# Altium PCB Breakout pcb.PcbDoc
Units mil, origin at the board's own origin, x right, y up, seen from the top; angles counter-clockwise.
Board outline 3280 x 1940 mil, 2 copper layers (Top Layer 1, Bottom Layer 1); 2 components, 34 nets, 72 pads, 30 vias.
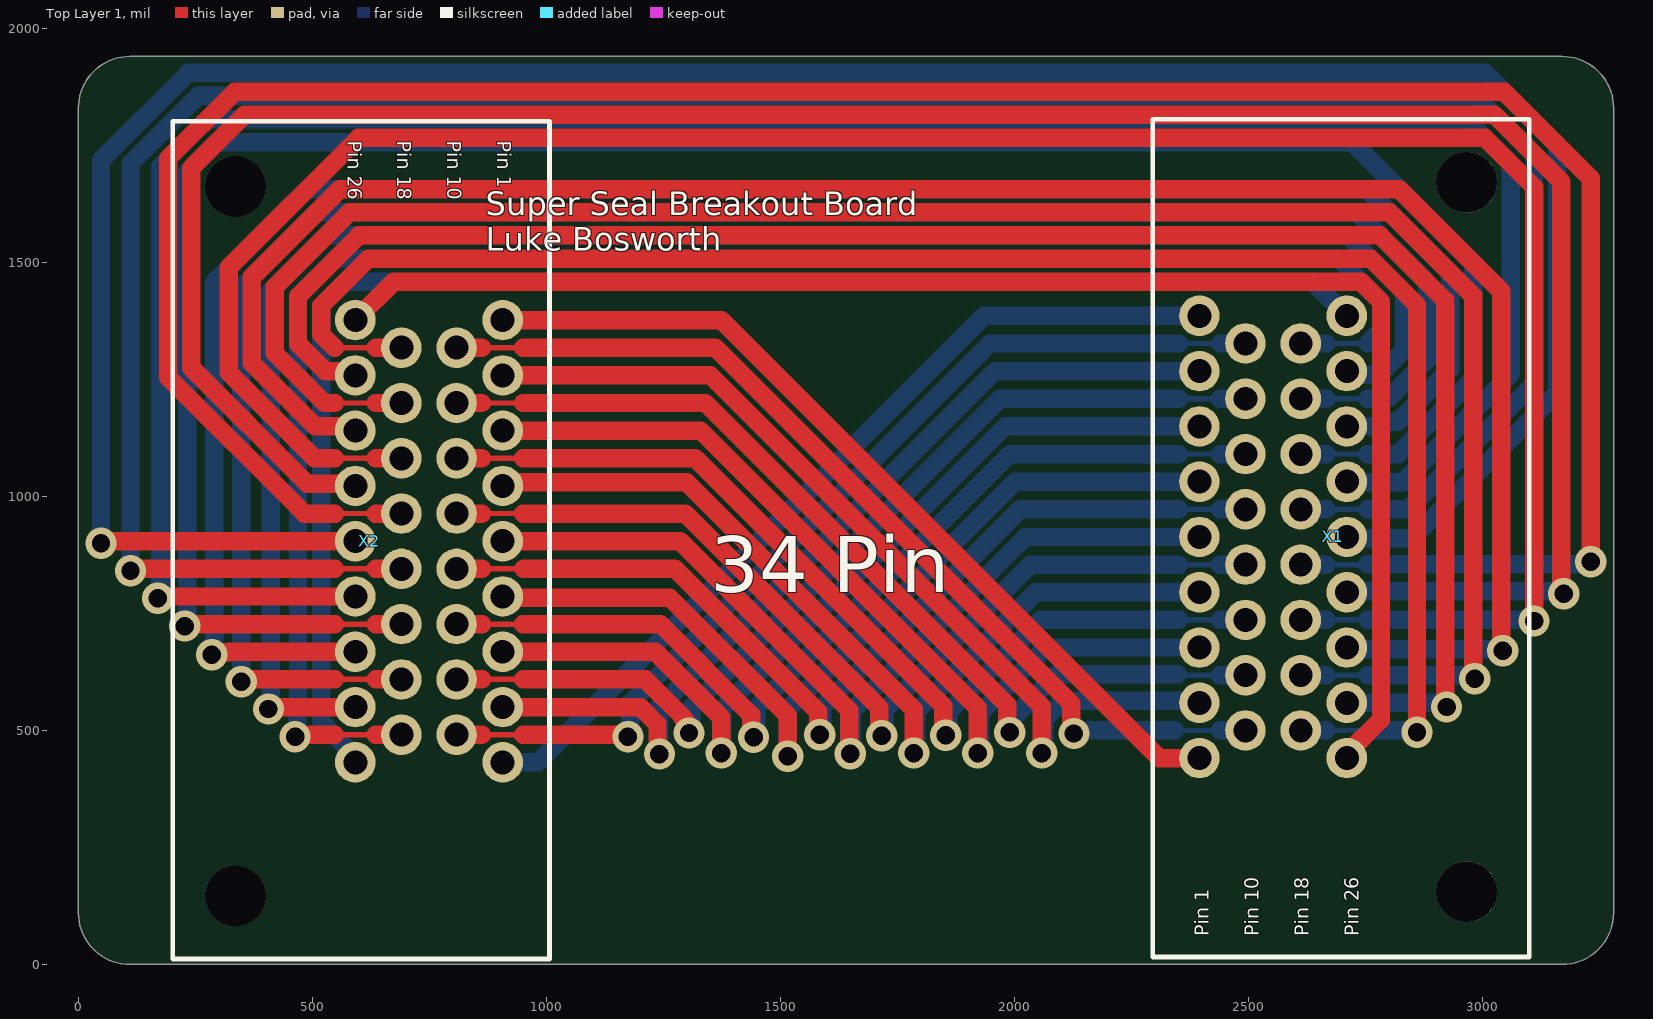
[diagram p0: Top Layer 1 view]
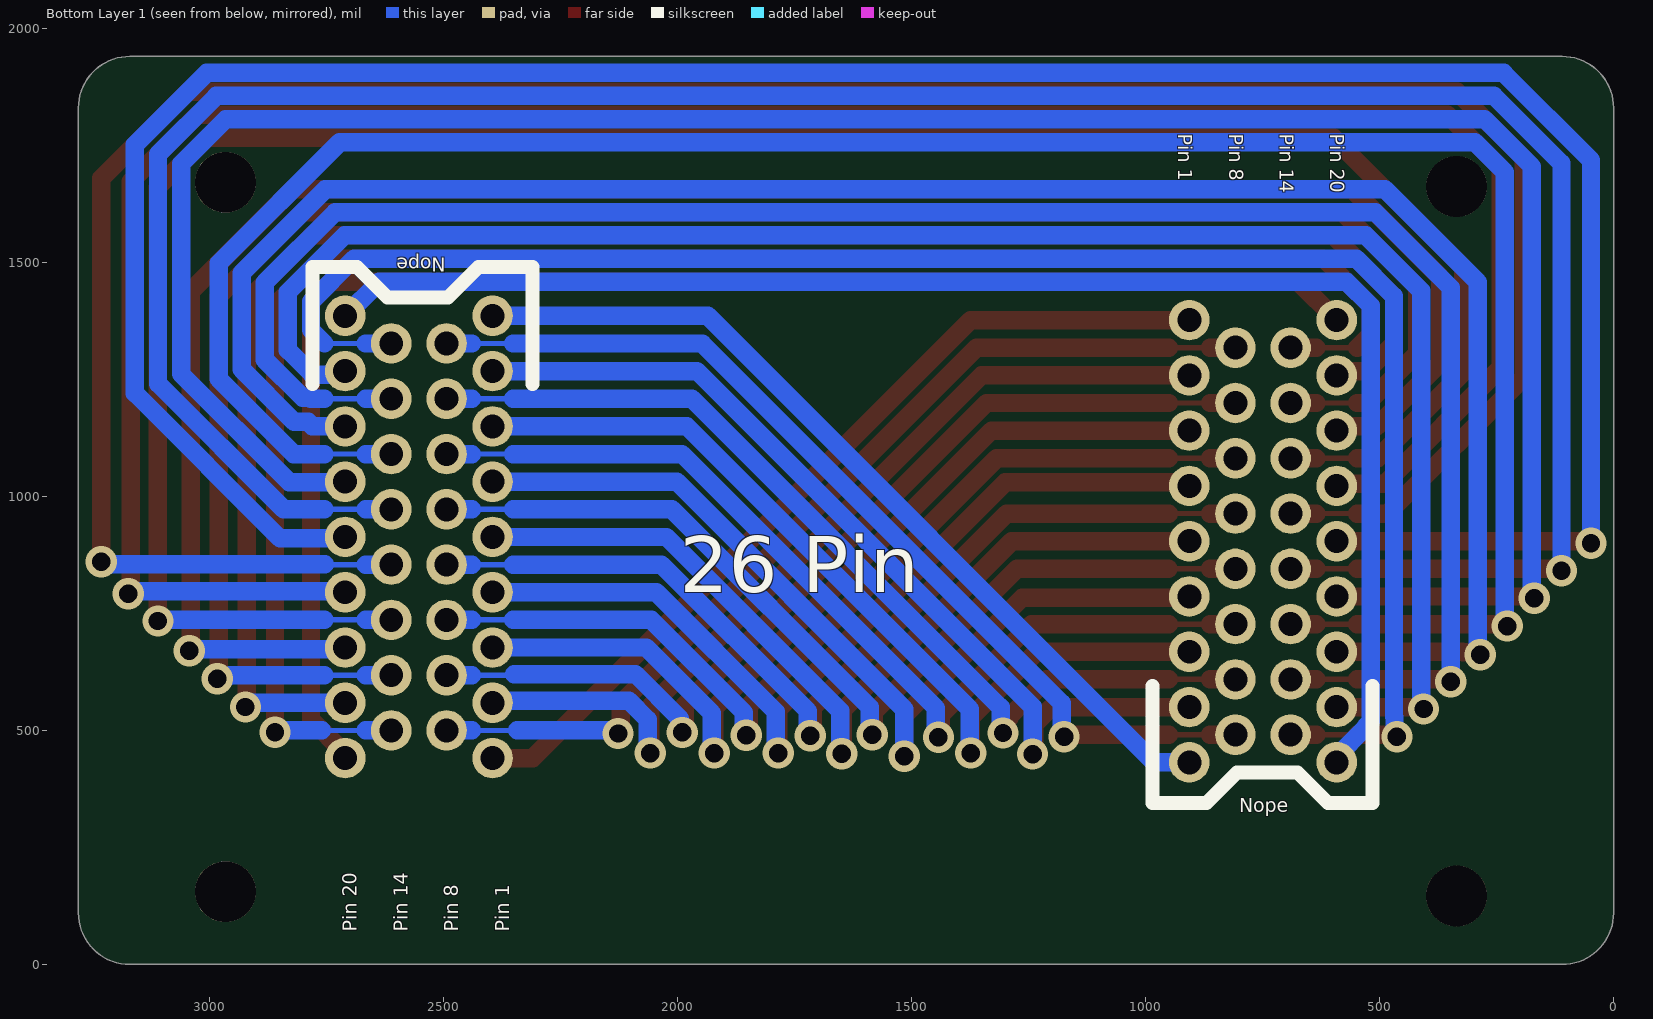
[diagram p1: Bottom Layer 1 view, seen from below]

## Layer stack, top to bottom
Top Solder: solder mask 0.4, Solder Resist, Dk 3.5
Top Layer 1: signal copper 1.378
Dielectric 1: dielectric 12.6, FR-4, Dk 4.8
Bottom Layer 1: signal copper 1.378
Bottom Solder: solder mask 0.4, Solder Resist, Dk 3.5

## Board outline
110.78,0.78 3170.78,0.78 ccw(c3170.78,110.78) 3280.78,110.78 3280.78,1830.78 ccw(c3170.78,1830.78) 3170.78,1940.78 110.78,1940.78 ccw(c110.78,1830.78) 0.78,1830.78 0.78,110.78 ccw(c110.78,110.78)

## Design rules (kind name [scope] priority, off if disabled: settings)
BoardOutlineClearance [All] p1: gap=7.87 ignorepadtopadclearanceinfootprint=FALSE except(15.75: Arc-SplitBarrior Arc-SplitContinuation Track-SplitBarrior Track-SplitContinuation SMDPad-SplitBarrior SMDPad-SplitContinuation THPad-SplitBarrior THPad-SplitContinuation Via-SplitBarrior Via-SplitContinuation Fill-SplitBarrior Fill-SplitContinuation Poly-SplitBarrior Poly-SplitContinuation Region-SplitBarrior Region-SplitContinuation Text-SplitBarrior Text-SplitContinuation)
Clearance "Clearance Bottom Layer" [OnLayer('Bottom Layer')] p1: gap=8 ignorepadtopadclearanceinfootprint=TRUE except(10: Arc-Text Track-Text SMDPad-Text THPad-Text Via-Text Fill-Text Poly-Text Region-Text Text-Text)
Clearance "Clearance Top Layer" [OnLayer('Top Layer')] p2: gap=8 ignorepadtopadclearanceinfootprint=TRUE except(10: Arc-Text Track-Text SMDPad-Text THPad-Text Via-Text Fill-Text Poly-Text Region-Text Text-Text)
Clearance [All] p3: gap=7.87 ignorepadtopadclearanceinfootprint=FALSE except(3.5: Arc-Arc Arc-Track Arc-SMDPad Track-Track Track-SMDPad SMDPad-SMDPad; 5: Arc-Via Track-Via SMDPad-Via THPad-Via Via-Via; 10: Arc-Text Track-Text SMDPad-Text THPad-Text Via-Text Fill-Text Poly-Text Region-Text Text-Text)
HoleSize [All] p1: absolutevalues=TRUE maxlimit=248.03 minlimit=7.87 maxpercent=80.000 minpercent=20.000
MinimumAnnularRing [All] p1: minimumring=3
MinimumSolderMaskSliver [All] p1: minsoldermaskwidth=3.94
PolygonConnect PolygonConnect_1 [All] p1: thpad.connectstyle=Relief thpad.reliefconductorwidth=20 thpad.reliefentries=4 thpad.polygonreliefangle="90 Angle" thpad.airgapwidth=10 smdpad.connectstyle=Relief smdpad.reliefconductorwidth=20 smdpad.reliefentries=4 smdpad.polygonreliefangle="90 Angle" smdpad.airgapwidth=10 via.connectstyle=Direct via.reliefconductorwidth=20 via.reliefentries=4 via.polygonreliefangle="90 Angle" via.airgapwidth=10
RoutingCorners [All] p1: cornerstyle=Round minsetback=100 maxsetback=100
RoutingVias [All] p1: holewidth=19.68 width=39.37 viastyle="Through Hole" minholewidth=7.87 minwidth=17.72 maxholewidth=39.37 maxwidth=78.74
SilkToSilkClearance [All] p1: silktosilkclearance=3.94
SilkToSolderMaskClearance [IsPad] p1: minsilkscreentomaskgap=3.94 clearancetoexposedcopper=TRUE
SolderMaskExpansion [All] p1: expansion=4 istentingtop=FALSE
Width [All] p1: maxlimit=100 minlimit=3.5 preferedwidth=15
25 further rules are at their usual default settings.

## Components (designator, comment, footprint, x,y, rotation, side; value= is the part's Value field where it differs from the comment)
X1 "6437288-1" 6437288-1 2395.82,441.59 r90 top
X2 "6437288-1" 6437288-1 907.32,1377.42 r270 top

## Footprints (in the part's own frame and the unit in brackets; to place one, negate y for a bottom-side part, rotate by r counter-clockwise, add the part's x,y. Pads: shape width x height; smd on the part's side, far side on the other; paste and mask are expansions set on the pad)
6437288-1 [mm]
  round 2.2 hole 1.3: A1(0,0) A2(3,0) A3(6,0) A4(9,0) A5(12,0) A6(15,0) A7(18,0) A8(21,0) A9(24,0) A10(1.5,-2.5) A11(4.5,-2.5) A12(7.5,-2.5) A13(10.5,-2.5) A14(13.5,-2.5) A15(16.5,-2.5) A16(19.5,-2.5) A17(22.5,-2.5) A18(1.5,-5.5) A19(4.5,-5.5) A20(7.5,-5.5) A21(10.5,-5.5) A22(13.5,-5.5) A23(16.5,-5.5) A24(19.5,-5.5) A25(22.5,-5.5) A26(0,-8) A27(3,-8) A28(6,-8) A29(9,-8) A30(12,-8) A31(15,-8) A32(18,-8) A33(21,-8) A34(24,-8)
  round 3.3 hole 3.3 unplated: MH(-7.25,-14.5) MH(31.25,-14.5)
  silkscreen extent -10.79,-17.91 34.67,2.54, body extent -10.75,-34 34.75,2.5, height 28.16

## Part data
X1 X2: "Superseal 34P", Circuits=34, ComponentLink1Description=Digikey, ComponentLink1URL=https://www.digikey.com/products/en?mpart=6437288-1&&csp=WT.z_cid%3Dsp_8004_20120425_buynow%26TE_cid%3D8004-1541898693362, Name=6437288-1

## Via types
v1: diameter 66.93, hole 39.37, Top Layer 1 to Bottom Layer 1, tented both sides, 30 vias

## Nets (pads, with @x,y where several pads share a name; then routed paths per layer and width w, separated by ;. In a path a pad name is that pad's centre, name@x,y a point inside that pad or via, vN(x,y) a via of type N, cw(c..) or ccw(c..) an arc to the next point about the centre after c; other vN are vias at no path point)
NetX1_A1: X1.A1 X2.A1 | length 1876.1
  Top Layer 1 w39.37: X2.A1 1374.29,1377.42 2310.11,441.59 X1.A1
NetX1_A2: X1.A2 X2.A2 | length 1967.6
  Top Layer 1 w39.37: X2.A2 1351.13,1259.31 2059.31,551.13 v1(2059.31,452.37)
  Bottom Layer 1 w39.37: v1(2059.31,452.37) 2064.58,457.64 2064.58,524.03 2104.62,564.07 2391.45,564.07 X1.A2
NetX1_A3: X1.A3 X2.A3 | length 1970.4
  Top Layer 1 w39.37: X2.A3 1329.61,1141.2 1922.27,548.53 v1(1922.27,452.37)
  Bottom Layer 1 w39.37: v1(1922.27,452.37) 1927.54,457.64 1927.54,537.68 2067.67,677.81 X1.A3
NetX1_A4: X1.A4 X2.A4 | length 1976.9
  Top Layer 1 w39.37: X2.A4 915.15,1030.92 1300.24,1030.92 1785.23,545.93 v1(1785.23,452.37)
  Bottom Layer 1 w39.37: v1(1785.23,452.37) 1790.5,457.64 1790.5,540.28 2046.14,795.92 X1.A4
NetX1_A5: X1.A5 X2.A5 | length 1972.7
  Top Layer 1 w39.37: X2.A5 1286.55,904.98 1648.11,543.41 1648.11,453.18 v1(1650.08,451.21)
  Bottom Layer 1 w39.37: v1(1650.08,451.21) 1653.47,454.6 1653.47,542.88 2024.61,914.03 X1.A5
NetX1_A6: X1.A6 X2.A6 | length 1982.3
  Top Layer 1 w39.37: X2.A6 910.23,783.96 1264.5,783.96 1516.15,532.3 v1(1516.15,445.67)
  Bottom Layer 1 w39.37: v1(1516.15,445.67) 1516.15,546.11 2002.18,1032.14 X1.A6
NetX1_A7: X1.A7 X2.A7 | length 1965
  Top Layer 1 w39.37: X2.A7 1233.42,668.76 1374.11,528.06 v1(1374.11,452.37)
  Bottom Layer 1 w39.37: v1(1374.11,452.37) 1376.19,454.45 1376.19,545.79 1980.65,1150.25 X1.A7
NetX1_A8: X1.A8 X2.A8 | length 1963.1
  Top Layer 1 w39.37: X2.A8 1201.06,550.65 1238.05,513.65 1238.05,454.27 v1(1242.16,450.16)
  Bottom Layer 1 w39.37: v1(1242.16,450.16) 1242.16,551.4 1959.12,1268.36 X1.A8
NetX1_A9: X1.A9 X2.A9 | length 1883.6
  Bottom Layer 1 w39.37: X2.A9 982.4,432.54 1936.33,1386.47 X1.A9
NetX1_A10: X1.A10 X2.A10 | length 2063.8
  Top Layer 1 w11.4: 863.15,1318.36 930.78,1318.36 951.49,1318.36
  Top Layer 1 w39.37: X2.A10 863.15,1318.36 ; 951.49,1318.36 1361.9,1318.36 2122.46,557.8 2122.46,499.47 v1(2127.73,494.2)
  Bottom Layer 1 w11.4: 2343.39,500.92 2343.66,500.65 2439.99,500.65
  Bottom Layer 1 w39.37: v1(2127.73,494.2) 2133,499.47 2152.49,499.47 2153.94,500.92 2343.39,500.92 ; 2439.99,500.65 X1.A10
NetX1_A11: X1.A11 X2.A11 | length 2075
  Top Layer 1 w11.4: 863.15,1200.25 951.49,1200.25
  Top Layer 1 w39.37: X2.A11 863.15,1200.25 ; 951.49,1200.25 1340.37,1200.25 1985.42,555.2 1985.42,501.67 v1(1990.69,496.4)
  Bottom Layer 1 w11.4: 2349.48,620.92 2351.6,618.8 2439.99,618.8
  Bottom Layer 1 w39.37: v1(1990.69,496.4) 1995.97,501.67 1995.97,526.11 2090.78,620.92 2349.48,620.92 ; 2439.99,618.76 X1.A11
NetX1_A12: X1.A12 X2.A12 | length 2091.4
  Top Layer 1 w11.4: 863.15,1082.14 951.49,1082.14
  Top Layer 1 w39.37: X2.A12 863.15,1082.14 ; 951.49,1082.14 1318.84,1082.14 1848.38,552.6 1848.38,495.58 v1(1853.65,490.31)
  Bottom Layer 1 w11.4: 2351.65,736.87 2439.99,736.87
  Bottom Layer 1 w39.37: v1(1853.65,490.31) 1858.93,495.58 1858.93,538.89 2056.91,736.87 2351.65,736.87 ; 2439.99,736.87 X1.A12
NetX1_A13: X1.A13 X2.A13 | length 2093.8
  Top Layer 1 w11.4: 863.15,964.03 951.49,964.03
  Top Layer 1 w39.37: X2.A13 863.15,964.03 ; 951.49,964.03 1297.31,964.03 1711.76,549.58 1711.76,494.37 v1(1717.03,489.1)
  Bottom Layer 1 w11.4: 2351.65,854.98 2439.99,854.98
  Bottom Layer 1 w39.37: v1(1717.03,489.1) 1722.3,494.37 1722.3,541.9 2035.38,854.98 2351.65,854.98 ; 2439.99,854.98 X1.A13
NetX1_A14: X1.A14 X2.A14 | length 2070.1
  Top Layer 1 w11.4: 882.88,845.97 951.54,845.97 951.83,846.26
  Top Layer 1 w39.37: X2.A14 863.15,845.92 ; 951.83,846.26 1275.44,846.26 1581.33,540.38 1581.33,494.68 v1(1584.53,491.48)
  Bottom Layer 1 w11.4: 2351.65,973.09 2439.99,973.09
  Bottom Layer 1 w39.37: v1(1584.53,491.48) 1589.8,496.75 1589.8,549.94 2012.95,973.09 2351.65,973.09 ; 2439.99,973.09 X1.A14
NetX1_A15: X1.A15 X2.A15 | length 2094.7
  Top Layer 1 w11.4: 863.15,727.81 897.56,727.81 951.49,727.81
  Top Layer 1 w39.37: X2.A15 863.15,727.81 ; 951.49,727.81 1244.18,727.81 1438.03,533.96 1438.03,491.27 v1(1443.31,486)
  Bottom Layer 1 w11.4: 2351.65,1091.2 2351.7,1091.15 2439.99,1091.15
  Bottom Layer 1 w39.37: v1(1443.31,486) 1448.58,491.27 1448.58,548.36 1991.42,1091.2 2351.65,1091.2 ; 2439.99,1091.2 X1.A15
NetX1_A16: X1.A16 X2.A16 | length 2069.9
  Top Layer 1 w11.4: 863.15,609.7 950.78,609.7
  Top Layer 1 w39.37: X2.A16 863.15,609.7 ; 950.78,609.7 1212,609.7 1292.21,529.5 1292.21,527.14 1300.04,519.31 1300.04,500.54 v1(1305.31,495.27)
  Bottom Layer 1 w11.4: 2351.65,1209.31 2439.99,1209.31
  Bottom Layer 1 w39.37: v1(1305.31,495.27) 1310.58,500.54 1310.58,550 1969.89,1209.31 2351.65,1209.31 ; 2439.99,1209.31 X1.A16
NetX1_A17: X1.A17 X2.A17 | length 2073.9
  Top Layer 1 w11.4: 863.15,491.59 951.49,491.59
  Top Layer 1 w39.37: X2.A17 863.15,491.59 ; 951.49,491.59 1170.81,491.59 v1(1174.9,487.5)
  Bottom Layer 1 w11.4: 2351.65,1327.42 2439.99,1327.42
  Bottom Layer 1 w39.37: v1(1174.9,487.5) 1180.17,492.77 1180.17,559.23 1948.36,1327.42 2351.65,1327.42 ; 2439.99,1327.42 X1.A17
NetX1_A18: X1.A18 X2.A18 | length 3831.4
  Top Layer 1 w11.4: 548.19,1318.36 636.53,1318.36
  Top Layer 1 w39.37: 548.19,1318.36 519.36,1347.18 519.36,1407.65 620.55,1508.84 2761.47,1508.84 2860.78,1409.52 v1(2860.78,496.55) ; 636.53,1318.36 X2.A18
  Bottom Layer 1 w11.4: 2666.61,500.65 2701.03,500.65 2760.92,500.65
  Bottom Layer 1 w39.37: X1.A18 2666.61,500.65 ; 2760.92,500.65 2856.69,500.65 v1(2860.78,496.55)
NetX1_A19: X1.A19 X2.A19 | length 4350.8
  Top Layer 1 w11.4: 548.19,1200.25 636.53,1200.25
  Top Layer 1 w39.37: 548.19,1200.25 526.66,1200.25 420.62,1306.28 420.62,1448.55 579.65,1607.58 2802.37,1607.58 2980.78,1429.16 2980.78,613.93 v1(2983.93,610.78) ; 636.53,1200.25 X2.A19
  Bottom Layer 1 w11.4: 2666.61,618.76 2754.95,618.76
  Bottom Layer 1 w39.37: X1.A19 2666.61,618.76 ; 2754.95,618.76 2956.47,618.76 2959.17,616.05 2978.66,616.05 v1(2983.93,610.78)
NetX1_A20: X1.A20 X2.A20 | length 5042.6
  Top Layer 1 w11.4: 548.19,1082.14 636.53,1082.14
  Top Layer 1 w39.37: 548.19,1082.14 505.13,1082.14 321.88,1265.38 321.88,1489.45 598.99,1766.55 3005.89,1766.55 3110.86,1661.58 3110.86,734.57 v1(3110.78,734.49) ; 636.53,1082.14 X2.A20
  Bottom Layer 1 w11.4: 2666.61,736.87 2754.95,736.87
  Bottom Layer 1 w39.37: X1.A20 2666.61,736.87 ; 2754.95,736.87 3108.41,736.87 v1(3110.78,734.49)
NetX1_A21: X1.A21 X2.A21 | length 5702.9
  Top Layer 1 w11.4: 548.19,964.03 636.53,964.03
  Top Layer 1 w39.37: 548.19,964.03 483.6,964.03 192.44,1255.19 192.44,1722.5 335.22,1865.29 3046.79,1865.29 3231.89,1680.2 v1(3231.89,860.78) ; 636.53,964.03 X2.A21
  Bottom Layer 1 w11.4: 2666.61,854.93 2739.13,854.93 2739.72,855.52 2754.41,855.52
  Bottom Layer 1 w39.37: X1.A21 2666.61,854.98 ; 2754.41,855.52 3226.62,855.52 v1(3231.89,860.78)
NetX1_A22: X1.A22 X2.A22 | length 5659.9
  Top Layer 1 w11.4: 548.19,845.92 636.53,845.92
  Top Layer 1 w39.37: v1(112.19,841.83) 116.28,845.92 548.19,845.92 ; 636.53,845.92 X2.A22
  Bottom Layer 1 w11.4: 2666.61,973.09 2732.95,973.09 2754.95,973.09
  Bottom Layer 1 w39.37: v1(112.19,841.83) 112.19,1712.08 256.35,1856.24 2986.03,1856.24 3110.7,1731.56 3110.7,1241.74 2842.05,973.09 2754.95,973.09 ; X1.A22 2666.61,973.09
NetX1_A23: X1.A23 X2.A23 | length 5000.4
  Top Layer 1 w11.4: 548.19,727.81 636.53,727.81
  Top Layer 1 w39.37: v1(227.94,723.72) 232.04,727.81 548.19,727.81 ; 636.53,727.81 X2.A23
  Bottom Layer 1 w11.4: 2666.61,1091.2 2725.12,1091.2 2754.95,1091.2
  Bottom Layer 1 w39.37: v1(227.94,723.72) 233.22,728.99 233.22,1693.46 297.25,1757.5 2722.26,1757.5 2981.25,1498.51 2981.25,1251.93 2820.52,1091.2 2754.95,1091.2 ; X1.A23 2666.61,1091.2
NetX1_A24: X1.A24 X2.A24 | length 4317.8
  Top Layer 1 w11.4: 548.19,609.7 636.53,609.7
  Top Layer 1 w39.37: v1(348.97,604.63) 354.04,609.7 548.19,609.7 ; 636.53,609.7 X2.A24
  Bottom Layer 1 w11.4: 2666.61,1209.31 2723.51,1209.31 2754.95,1209.31
  Bottom Layer 1 w39.37: v1(348.97,604.63) 348.97,1446.71 509.83,1607.58 2732.55,1607.58 2882.51,1457.61 2882.51,1292.83 2801.23,1211.55 2786.17,1211.55 2783.93,1209.31 2754.95,1209.31 ; X1.A24 2666.61,1209.31
NetX1_A25: X1.A25 X2.A25 | length 3855.5
  Top Layer 1 w11.4: 548.19,491.59 X2.A25
  Top Layer 1 w39.37: v1(463.69,487.5) 467.78,491.59 548.19,491.59 ; 636.53,491.59 X2.A25
  Bottom Layer 1 w11.4: 2666.61,1327.42 2754.95,1327.42
  Bottom Layer 1 w39.37: v1(463.69,487.5) 468.96,492.77 468.96,529.3 469.99,530.33 469.99,1428.1 550.73,1508.84 2691.65,1508.84 2783.77,1416.71 2783.77,1356.24 2754.95,1327.42 ; X1.A25 2666.61,1327.42
NetX1_A26: X1.A26 X2.A26 | length 3248.5
  Top Layer 1 w39.37: X2.A26 674.4,1459.46 2741.02,1459.46 2783.77,1416.71 2783.77,523.77 2710.78,450.78 X1.A26
NetX1_A27: X1.A27 X2.A27 | length 3900.6
  Top Layer 1 w39.37: X2.A27 583.32,1268.35 528.38,1268.35 469.99,1326.73 469.99,1428.1 600.1,1558.21 2781.92,1558.21 2920.78,1419.34 2920.78,553.93 v1(2923.93,550.78)
  Bottom Layer 1 w39.37: X1.A27 2907.55,559.7 2916.47,550.78 v1(2923.93,550.78)
NetX1_A28: X1.A28 X2.A28 | length 4407.4
  Top Layer 1 w39.37: X2.A28 583.32,1150.24 506.85,1150.24 371.25,1285.83 371.25,1469 559.2,1656.95 2822.82,1656.95 3040.78,1438.98 3040.78,673.93 v1(3043.93,670.78)
  Bottom Layer 1 w39.37: X1.A28 2714.3,674.3 3040.42,674.3 v1(3043.93,670.78)
NetX1_A29: X1.A29 X2.A29 | length 5261.7
  Top Layer 1 w39.37: X2.A29 587.99,1027.45 489.99,1027.45 241.81,1275.64 241.81,1702.05 355.67,1815.92 3026.34,1815.92 3168.74,1673.53 3168.74,797.64 v1(3174.01,792.37)
  Bottom Layer 1 w39.37: X1.A29@2712.5,797.64 3168.74,797.64 v1(3174.01,792.37)
NetX1_A30: X1.A30 X2.A30 | length 5724.9
  Top Layer 1 w39.37: v1(49.04,900.78) 53.23,904.98 X2.A30
  Bottom Layer 1 w39.37: v1(49.04,900.78) 49.04,1718.75 235.9,1905.61 3006.48,1905.61 3160.07,1752.01 3160.07,1221.29 2849.7,910.92 2713.89,910.92 X1.A30
NetX1_A31: X1.A31 X2.A31 | length 5212.3
  Top Layer 1 w39.37: v1(170.07,782.77) 174.16,786.87 X2.A31
  Bottom Layer 1 w39.37: v1(170.07,782.77) 175.34,788.04 175.34,1705.41 276.8,1806.87 2965.58,1806.87 3061.33,1711.11 3061.33,1262.19 2830.06,1030.92 2712,1030.92 X1.A31
NetX1_A32: X1.A32 X2.A32 | length 4382.4
  Top Layer 1 w39.37: v1(285.82,662.15) 291.09,667.42 322.46,667.42 323.79,668.76 X2.A32
  Bottom Layer 1 w39.37: v1(285.82,662.15) 291.09,667.42 291.09,1458.66 489.38,1656.95 2753,1656.95 2931.88,1478.06 2931.88,1272.38 2819.44,1159.94 2789.8,1159.94 2780.78,1150.92 2711.45,1150.92 X1.A32
NetX1_A33: X1.A33 X2.A33 | length 3874
  Top Layer 1 w39.37: v1(406.84,546.55) 410.94,550.65 X2.A33
  Bottom Layer 1 w39.37: v1(406.84,546.55) 412.12,551.82 412.12,1440.04 530.28,1558.21 2712.1,1558.21 2833.14,1437.16 2833.14,1313.28 2780.78,1260.92 2718.22,1260.92 X1.A33
NetX1_A34: X1.A34 X2.A34 | length 3248.5
  Bottom Layer 1 w39.37: X2.A34 592.36,445.32 530.84,506.84 530.84,508.94 519.36,520.41 519.36,1407.65 571.18,1459.46 2637.79,1459.46 X1.A34
pads on no net: X1.MH X2.MH

## Silkscreen, mask and mechanical layers (free items; w line width, h text height)
Top Overlay:
  text "Pin 26" at 575.78,1760.92 h30 r270
  text "Pin 18" at 682.45,1760.92 h30 r270
  text "Pin 10" at 789.12,1760.92 h30 r270
  text "Pin 1" at 895.78,1760.92 h30 r270
  text "Super Seal Breakout Board / Luke Bosworth" at 870.78,1525.92 h50
  text "34 Pin" at 1350.78,795.92 h120
  text "Pin 1" at 2415.78,60.92 h30 r90
  text "Pin 10" at 2522.45,60.92 h30 r90
  text "Pin 18" at 2629.12,60.92 h30 r90
  text "Pin 26" at 2735.78,60.92 h30 r90
Bottom Overlay:
  lines w29.53: 515.78,595.92 515.78,345.92 610.78,345.92 675.78,410.92 805.78,410.92 870.78,345.92 985.78,345.92 985.78,595.92 ; 2310.78,1240.92 2310.78,1490.92 2425.78,1490.92 2490.78,1425.92 2620.78,1425.92 2685.78,1490.92 2780.78,1490.92 2780.78,1240.92
  text "Pin 20" at 605.78,1775.92 h30 r90
  text "Pin 14" at 714.12,1775.92 h30 r90
  text "Pin 8" at 822.45,1775.92 h30 r90
  text "Pin 1" at 930.78,1775.92 h30 r90
  text "Nope" at 2495.78,1510.92 h30 r180
  text "26 Pin" at 1995.78,795.92 h120
  text "Nope" at 800.78,325.92 h30
  text "Pin 1" at 2360.78,70.92 h30 r270
  text "Pin 8" at 2469.11,70.92 h30 r270
  text "Pin 14" at 2577.45,70.92 h30 r270
  text "Pin 20" at 2685.78,70.92 h30 r270
Mechanical 1:
  lines w10: 5,115 ccw(c120,115) 120,0 3170,0 ccw(c3170,115) 3285,115 3285,1825 ccw(c3170,1825) 3170,1940 120,1940 ccw(c120,1825) 5,1825 5,115